# EAGLE board interface_dac_sma_feedback_3PS_LM317 (EAGLE 7.2.0)
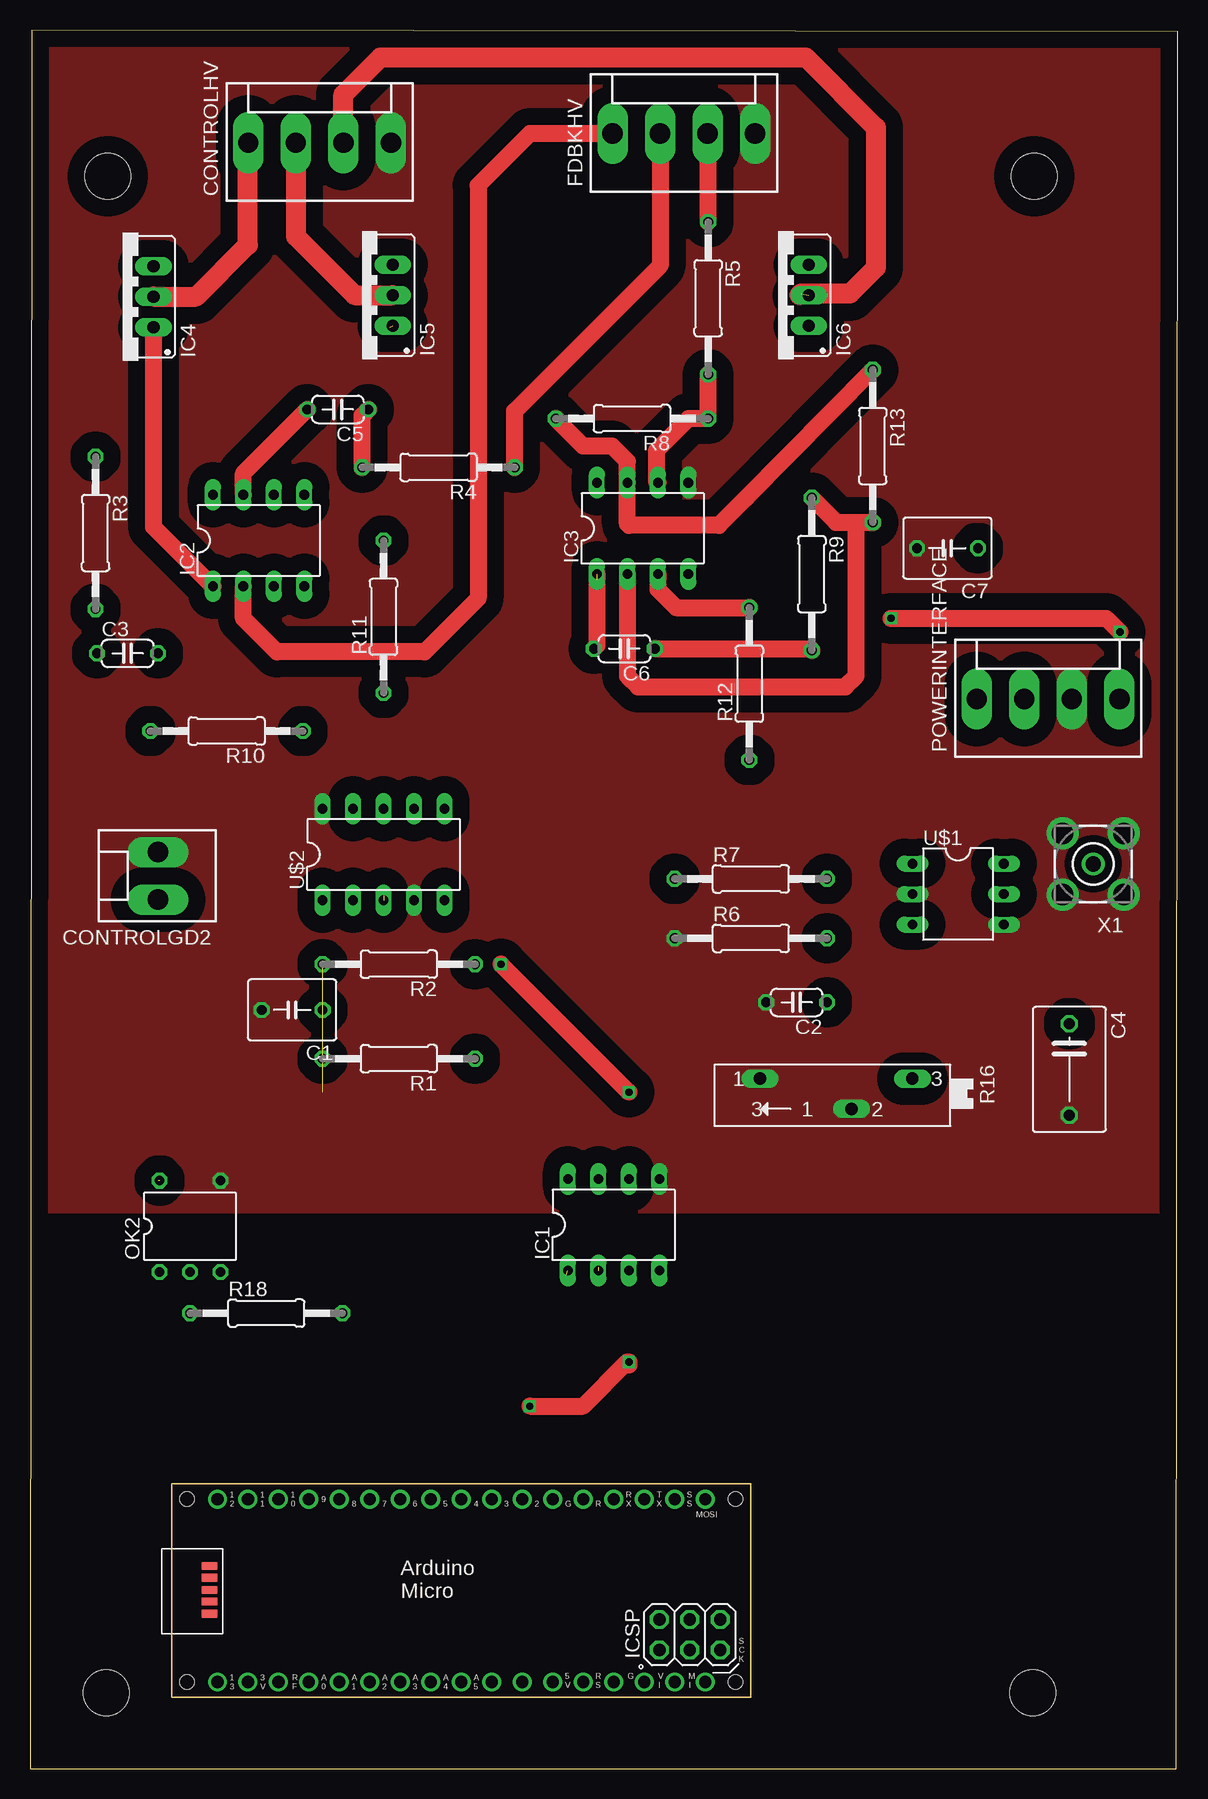
[diagram p0: board, top side]
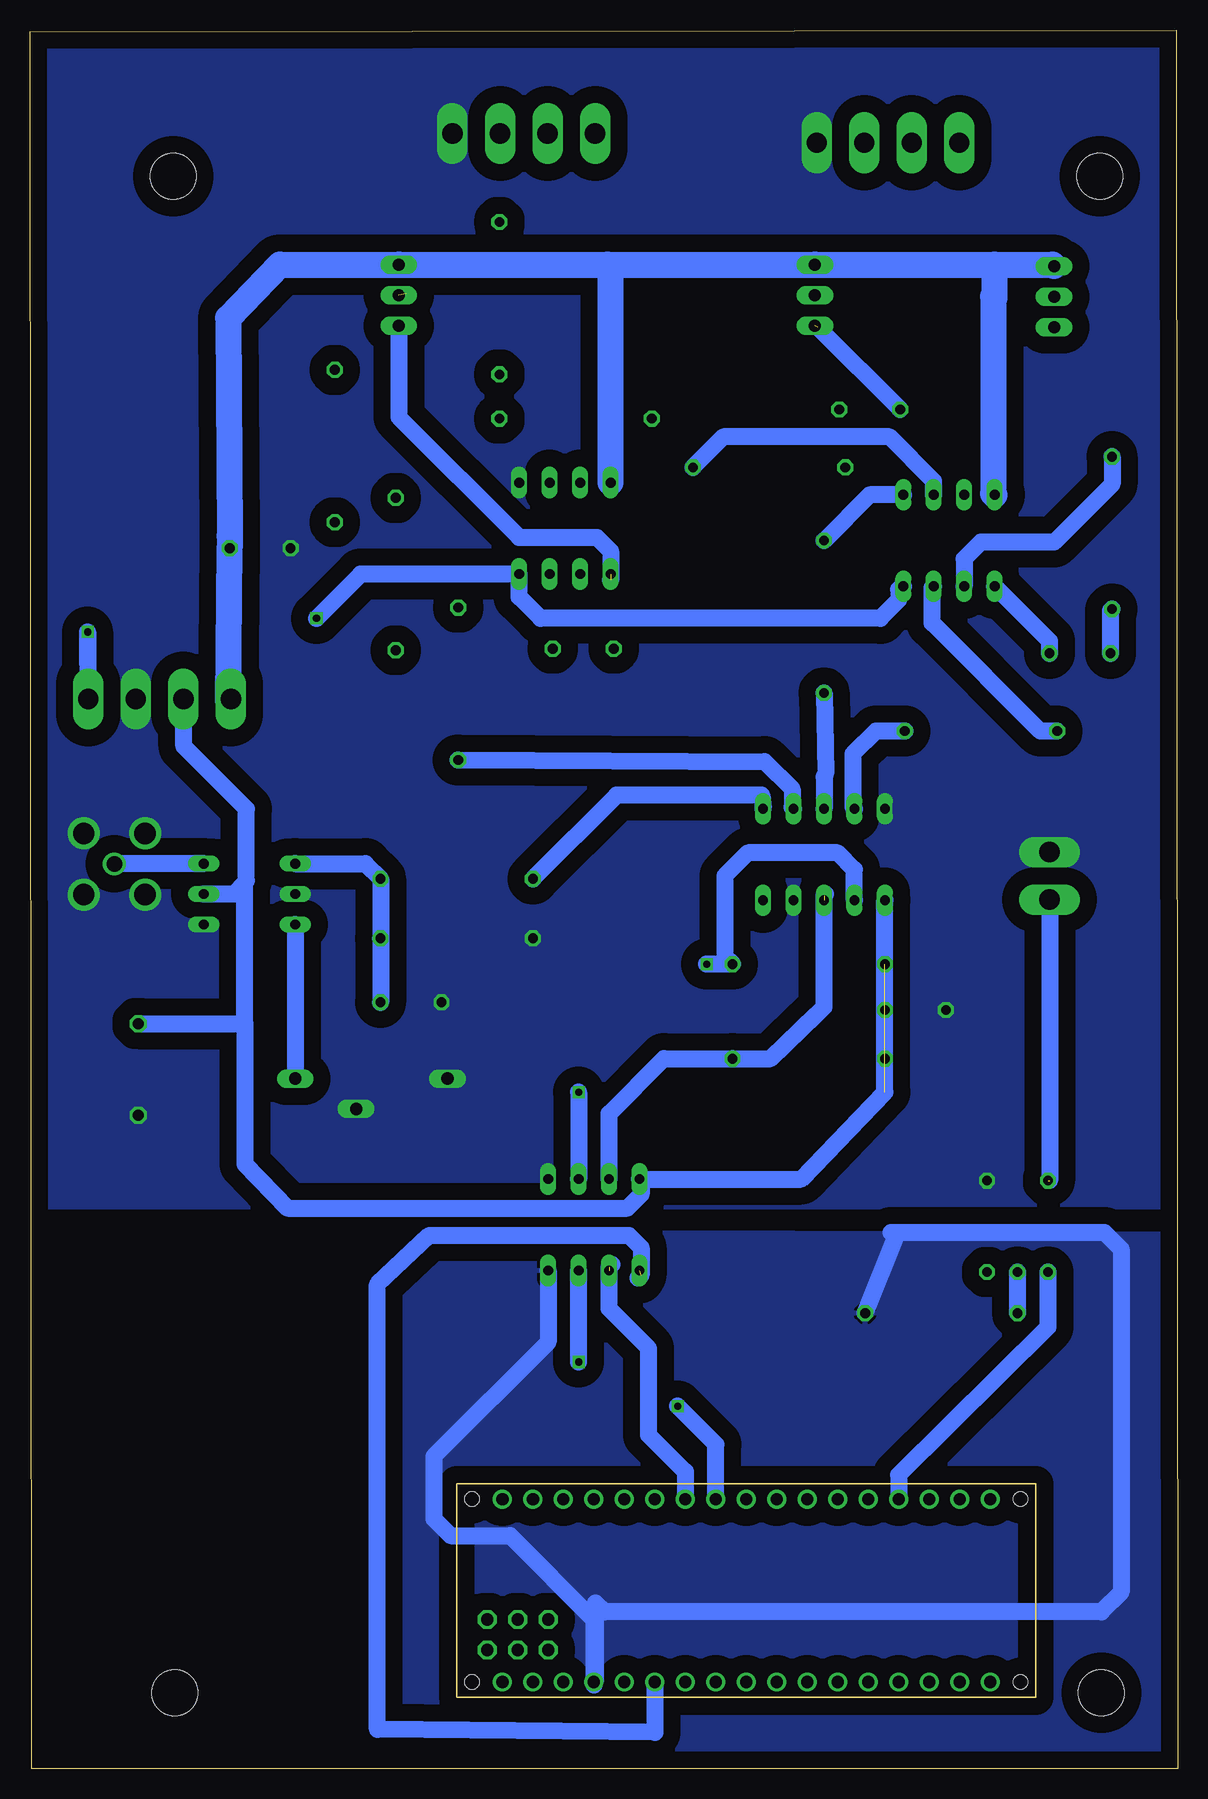
[diagram p1: board, bottom side, seen from below]

Size 95.63 x 144.91 mm. Coordinates in mm from the lower left corner, seen from the top.
Outline: 0,0 95.5,0 95.63,144.78 0.13,144.91 0,0
Copper layers (1*16): Top 0.035mm / dielectric 1.5mm / Bottom 0.035mm
Design rules "default *": minimum track width 56mil, minimum drill 24mil, track to track 56mil, track to pad 56mil, pad to pad 56mil, via to via 56mil, smd to smd 8mil, copper to edge 40mil, drill to drill 8mil, minimum pad ring 10mil, minimum via ring 8mil, stop-mask expansion 4mil, vias tented up to drill 0mil, thermal gap 10mil
Holes 3.8 mm at 83.57,6.35 83.69,132.72 6.48,132.72 6.35,6.35

## Footprints (pad centres in the part's own frame; a part is rotated, then mirrored left to right if it is on the bottom)
C050-050X075 = drill 0.813 octagon: 1 -2.54,0; 2 2.54,0
C050-024X044 = drill 0.813 octagon: 1 -2.54,0; 2 2.54,0
C075-063X106 = drill 0.914 octagon: 1 -3.81,0; 2 3.81,0
KK-156-2 = drill 1.7 pad 2.184 long: 1 -1.98,0; 2 1.98,0
KK-156-4 = drill 1.7 pad 2.184 long: 1 -5.94,0; 2 -1.98,0; 3 1.98,0; 4 5.94,0
DIL08 = drill 0.813 long: 1 -3.81,-3.81; 2 -1.27,-3.81; 3 1.27,-3.81; 4 3.81,-3.81; 5 3.81,3.81; 6 1.27,3.81; 7 -1.27,3.81; 8 -3.81,3.81
317TS = drill 1.016 long: 1 -2.54,-2.54; 2 0,-2.54; 3 2.54,-2.54
DIL05 = drill 0.813 octagon: 1 -2.54,-3.81; 2 0,-3.81; 3 2.54,-3.81; 4 2.54,3.81; 6 -2.54,3.81
ARDUINO_MICRO = drill 1.016 pad 1.575: 3V3 6.35,1.27; +5V 31.75,1.27; A0 11.43,1.27; A1 13.97,1.27; A2 16.51,1.27; A3 19.05,1.27; A4 21.59,1.27; A5 24.13,1.27; D2 29.21,16.51; D3 26.67,16.51; D4 24.13,16.51; D5 21.59,16.51; D6 19.05,16.51; D7 16.51,16.51; D8 13.97,16.51; D9 11.43,16.51; D10 8.89,16.51; D11 6.35,16.51; D12 3.81,16.51; D13 3.81,1.27; GND 31.75,16.51; GND. 36.83,1.27; MISO] 41.91,1.27; MOSI 44.45,16.51; NC 26.67,1.27; NC. 29.21,1.27; REF 8.89,1.27; RST 34.29,16.51; RST. 34.29,1.27; RX1 36.83,16.51; SCK 44.45,1.27; SS 41.91,16.51; TX1 39.37,16.51; VIN 39.37,1.27 | drill 1.016 pad 1.575 octagon: 5V 40.64,6.477; GND_ 45.72,6.477; MISO. 40.64,3.937; MOSI. 43.18,6.477; RESET.. 45.72,3.937; SCK. 43.18,3.937 | smd 1.27 x 0.635: <USB>+V 3.15,10.947; <USB>D+ 3.15,9.957; <USB>D- 3.15,8.941; <USB>GND 3.15,6.96; <USB>ID 3.15,7.976 | hole 1.2: 1.27,1.27; 1.27,16.51; 46.99,16.51; 46.99,1.27
0207/12 = drill 0.813 octagon: 1 -6.35,0; 2 6.35,0
SP19L = drill 1.016 long: A 5.715,-1.27; E -6.985,-1.27; S -1.905,1.27
DIL06 = drill 0.813 long: DIV 2.54,3.81; GND 0,-3.81; MOD -2.54,-3.81; OUT -2.54,3.81; SET 2.54,-3.81; VCC 0,3.81
DIL10 = drill 0.813 long: 1 -5.08,-3.81; 2 -2.54,-3.81; 3 0,-3.81; 4 2.54,-3.81; 5 5.08,-3.81; 6 5.08,3.81; 7 2.54,3.81; 8 0,3.81; 9 -2.54,3.81; 10 -5.08,3.81
BU-SMA-V = drill 1.27: 1 0,0 | drill 1.778: 2 -2.55,2.55; 3 2.55,2.55; 4 2.55,-2.55; 5 -2.55,-2.55

## Placement (x,y rotation side)
C1  [C050-050X075]  21.84,63.25 180 top
C2  10n  [C050-024X044]  63.88,63.88 180 top
C3  10n  [C050-024X044]  8.13,92.96 0 top
C4  10n  [C075-063X106]  86.61,58.29 270 top
C5  10n  [C050-024X044]  25.65,113.28 180 top
C6  10n  [C050-024X044]  49.53,93.34 180 top
C7  10n  [C050-050X075]  76.45,101.73 180 top
CONTROLGD2  [KK-156-2]  10.67,74.42 90 top
CONTROLHV  [KK-156-4]  24.13,135.51 0 top
FDBKHV  [KK-156-4]  54.48,136.27 0 top
IC1  ISO1540  [DIL08]  48.64,45.34 0 top
IC2  LT1352PA  [DIL08]  19.05,102.36 0 top
IC3  LT1352PA  [DIL08]  51.05,103.38 0 top
IC4  [317TS]  7.75,122.68 90 top
IC5  [317TS]  27.69,122.81 90 top
IC6  [317TS]  62.36,122.81 90 top
OK2  H11F1  [DIL05]  13.34,45.21 0 top
PCB1  ARDUINO_MICRO  [ARDUINO_MICRO]  11.81,5.97 0 top
POWERINTERFACE  [KK-156-4]  84.84,89.15 0 top
R1  1.5k  [0207/12]  30.73,59.18 180 top
R2  1.5k  [0207/12]  30.73,67.06 180 top
R3  10k  [0207/12]  5.46,103 270 top
R4  10k  [0207/12]  34.04,108.46 180 top
R5  20k  [0207/12]  56.52,122.56 270 top
R6  10k  [0207/12]  60.07,69.22 0 top
R7  40k  [0207/12]  60.07,74.17 0 top
R8  20k  [0207/12]  50.16,112.52 180 top
R9  10k  [0207/12]  65.15,99.57 270 top
R10  10k  [0207/12]  16.38,86.49 180 top
R11  10k  [0207/12]  29.46,96.01 90 top
R12  12  [0207/12]  59.94,90.42 90 top
R13  10k  [0207/12]  70.23,110.24 270 top
R16  [SP19L]  66.55,56.26 180 top
R18  100  [0207/12]  19.68,37.97 0 top
U$1  LTC6992  [DIL06]  77.34,72.9 270 top
U$2  MCP4728DIL  [DIL10]  29.46,76.2 0 top
X1  BU-SMA-V  [BU-SMA-V]  88.6,75.41 180 top

## Library data of the parts
C1 R18 = rcl
C2-C7 R1-R13 = resistor
CONTROLGD2 CONTROLHV FDBKHV POWERINTERFACE = con-molex; OC_FARNELL: unknown; OC_NEWARK: unknown
IC1 = texas
IC2 IC3 = linear-technology; OC_FARNELL: unknown; OC_NEWARK: unknown
IC4-IC6 = v-reg
OK2 = optocoupler; OC_FARNELL: unknown; OC_NEWARK: unknown
PCB1 = E14_Arduino_published
R16 = pot
U$1 = linear-technology
U$2 = microchip
X1 = con-coax; OC_FARNELL: unknown; OC_NEWARK: unknown

## Nets
+12V: C7.1 IC2.8 IC3.8 IC4.3 IC5.3 IC6.3 POWERINTERFACE.1
-5V: IC2.4 IC3.4 POWERINTERFACE.4
A+5: IC1.1 PCB1.+5V
AGND: IC1.4 PCB1.GND. R18.2
D4: PCB1.D4
D7: PCB1.D7
D8: PCB1.D8
D10: PCB1.D10
D11: PCB1.D11
ENSW2: CONTROLGD2.1 OK2.6
GND: C1.2 C2.2 C4.2 C7.2 CONTROLGD2.2 CONTROLHV.4 FDBKHV.4 IC1.5 IC3.5 OK2.4 POWERINTERFACE.3 R6.1 R16.A R16.S U$1.DIV U$1.GND U$2.4 U$2.10 X1.2 X1.3 X1.4 X1.5
N$1: R7.1 U$2.6
N$2: C2.1 R6.2 R7.2 U$1.MOD
N$3: C3.1 R3.2
N$4: CONTROLHV.1 IC4.2
N$5: CONTROLHV.2 IC5.2
N$6: FDBKHV.2 IC2.6 R4.1
N$7: OK2.2 R18.1
N$8: FDBKHV.1 IC2.2 R3.1
N$9: FDBKHV.3 R5.1
N$10: C5.2 IC2.7 IC5.1
N$11: CONTROLHV.3 IC6.2
N$12: R16.E U$1.SET
N$13: U$1.OUT X1.1
N$14: IC3.7 R8.2 R13.1
N$15: C5.1 R4.2
N$16: IC2.3 R10.2
N$17: IC2.5 R11.2
N$18: IC3.3 R12.2
N$19: C3.2 IC2.1 IC4.1
N$20: C6.1 R9.2
N$21: C6.2 IC3.1 IC6.1
N$23: IC3.6 R5.2 R8.1
N$24: R10.1 U$2.9
N$25: R12.1 U$2.7
N$26: R11.1 U$2.8
N$27: IC3.2 R9.1 R13.2
PWM5: PCB1.D5
PWM6: PCB1.D6
PWM9: OK2.1 PCB1.D9
SCL: IC1.3 PCB1.D3
SCL_OUT: IC1.6 R2.1 U$2.2
SDA: IC1.2 PCB1.D2
SDA_OUT: IC1.7 R1.1 U$2.3
VCC: C1.1 C4.1 IC1.8 POWERINTERFACE.2 R1.2 R2.2 U$1.VCC U$2.1

## Tracks (layer width: path | path; a pad name or v marks a point on that pad's centre or on a via)
+12V
  Bottom 2.184: POWERINTERFACE.1 79.12,89.03 C7.1 78.99,102.74 79.12,120.9 74.8,125.35 IC6.3 47.5,125.35 | IC2.8 15.37,106.3 15.37,122.68 15.24,122.56 15.24,125.35 | 47.5,125.35 IC5.3 15.24,125.35 | 15.24,125.35 10.41,125.35 IC4.3 | IC3.8 47.24,125.09 47.5,125.35
-5V  (via drill 0.6)
  Top 1.422: v71.75,95.89 89.69,95.89 v90.83,94.75
  Bottom 1.422: IC2.4 22.99,98.55 23.24,98.3 23.24,97.41 24.77,95.89 53.09,95.89 54.86,97.66 IC3.4 68.07,99.57 v71.75,95.89 | POWERINTERFACE.4 v90.83,94.75 90.83,89.2 POWERINTERFACE.4
A+5  (1 unrouted)
  Bottom 1.422: PCB1.+5V 43.56,3.05 66.67,3.3 66.67,40.39 62.36,44.45 45.72,44.45 44.7,43.43 44.7,41.15 44.96,40.89
AGND
  Bottom 1.422: IC1.4 52.45,35.56 61.98,26.04 61.98,20.83 60.58,19.43 55.63,19.43 48.64,12.45 PCB1.GND. | PCB1.GND. 48.64,6.99 | R18.2 23.5,44.32 23.88,44.7 6.1,44.7 4.7,43.31 4.7,14.73 6.35,13.08 47.75,13.08 48.51,13.84 48.51,7.37 PCB1.GND.
  pour Bottom (isolate 1.422): -0.13,0.13 95.76,0.25 95.76,44.83 0,44.58
ENSW2  (1 unrouted)
  Bottom 1.422: CONTROLGD2.1 10.67,49.02
GND
  pour Bottom (isolate 1.422, no thermals): 0.13,144.65 95.63,144.65 95.5,46.86 0,46.86
  pour Top (isolate 1.422, no thermals): 0.13,144.78 95.76,144.78 95.63,46.48 0,46.48
N$1
  Bottom 1.422: U$2.6 34.67,81.15 46.74,81.15 R7.1
N$2
  Bottom 1.422: U$1.MOD 67.69,75.44 R7.2 R6.2 C2.1
N$3
  Bottom 1.422: C3.1 5.59,96.52 R3.2
N$4
  Top 1.676: IC4.2 13.84,122.68 18.16,127 18.16,135.66 CONTROLHV.1
N$5
  Top 1.676: CONTROLHV.2 22.15,127.71 27.05,122.81 IC5.2
N$6
  Top 1.422: FDBKHV.2 52.5,125.27 40.39,113.16 R4.1
  Bottom 1.422: IC2.6 20.32,107.31 24,111 37.85,111 R4.1
N$7
  Bottom 1.422: R18.1 OK2.2
N$8
  Top 1.422: FDBKHV.1 41.66,136.27 37.34,131.95 37.34,97.54 32.89,93.09 20.57,93.09 17.78,95.89 IC2.2
  Bottom 1.422: R3.1 5.46,107.06 10.29,102.23 16.38,102.23 17.78,100.84 IC2.2
N$9
  Top 1.422: R5.1 56.52,136.22 FDBKHV.3
N$10  (1 unrouted)
  Top 1.422: IC2.7 17.78,107.95 C5.2
  Bottom 1.422: 29.97,120.14 C5.2
N$11  (1 unrouted)
  Top 1.676: CONTROLHV.3 26.11,139.52 29.21,142.62 64.64,142.62 70.48,136.78 70.48,125.09 68.33,122.94 64.26,122.94 64.14,122.81
N$12
  Bottom 1.422: U$1.SET R16.E
N$13
  Bottom 1.422: U$1.OUT 88.32,75.44 X1.1
N$14
  Top 1.422: R13.1 59.69,105.92 57.4,103.63 49.91,103.63 49.78,103.76 IC3.7 49.78,108.97 48.51,110.24 46.1,110.24 R8.2
N$15
  Top 1.422: R4.2 27.69,112.78 C5.1
N$16
  Bottom 1.422: R10.2 11.43,86.49 20.45,95.5 20.45,98.42 IC2.3
N$17
  Bottom 1.422: IC2.5 25.65,106.17 R11.2
N$18
  Top 1.422: IC3.3 52.32,98.3 53.85,96.77 R12.2
N$19
  Top 1.422: IC2.1 10.29,103.5 IC4.1
  Bottom 1.422: C3.2 10.67,93.98 IC2.1
N$20
  Top 1.422: C6.1 65.02,93.34 R9.2
N$21  (1 unrouted)
  Top 1.422: IC3.1 47.24,93.6 C6.2
  Bottom 1.422: IC6.1 64.9,112.65 54.86,102.62 48.39,102.62 47.24,101.47 47.24,99.06
N$23
  Top 1.422: IC3.6 52.2,107.31 52.2,109.86 54.86,112.52 R8.1 R5.2
N$24
  Bottom 1.422: R10.1 25.15,86.49 27.05,84.58 27.05,80.14 U$2.9
N$25
  Bottom 1.422: R12.1 34.42,83.95 32.13,81.66 32.13,80.14 U$2.7
N$26
  Bottom 1.422: R11.1 29.34,82.93 29.46,82.68 U$2.8
N$27
  Top 1.422: R9.1 67.18,103.89 68.83,103.89 | 68.83,103.89 R13.2 | IC3.2 49.78,91.06 50.67,90.17 67.94,90.17 68.83,91.06 68.83,103.89
PWM9
  Bottom 1.422: PCB1.D9 23.24,24.51 10.79,36.83 OK2.1
SCL  (via drill 0.6)
  Top 1.422: v41.66,30.23 46.1,30.23 49.78,33.91 49.91,33.66 v49.91,33.91
  Bottom 1.422: PCB1.D3 38.48,27.05 v41.66,30.23 | v49.91,33.91 IC1.3
SCL_OUT  (via drill 0.6)
  Top 1.422: v39.24,67.06 v49.91,56.39
  Bottom 1.422: U$2.2 26.92,74.93 28.32,76.33 35.81,76.33 37.72,74.42 37.72,67.69 R2.1 v39.24,67.06 | v49.91,56.39 IC1.6
SDA  (1 unrouted)
  Bottom 1.422: PCB1.D2 41.02,24.77 44.07,27.81 44.07,35.05 47.37,38.35 47.37,41.78 47.12,42.04
SDA_OUT  (1 unrouted)
  Bottom 1.422: IC1.7 47.37,54.61 42.8,59.18 R1.1 33.91,59.18 30.1,62.87 29.46,63.5 29.46,72.77 29.34,72.9
VCC  (3 unrouted)
  Bottom 1.422: 77.72,73.79 77.6,74.04 77.6,80.01 82.8,85.22 82.8,89.59 POWERINTERFACE.2 | 77.72,73.79 78.61,72.9 U$1.VCC | C4.1 77.72,62.1 | 77.72,62.1 77.72,73.79 | U$2.1 24.38,56.39 31.37,49.15 IC1.8 44.7,49.02 44.7,47.88 45.85,46.74 74.17,46.74 77.72,50.42 77.72,62.1